# Altium PCB power.PcbDoc
Units mm, origin at the board's own origin, x right, y up, seen from the top; angles counter-clockwise.
Board outline 461.9 x 457.33 mm, 2 copper layers (Top Layer, Bottom Layer); 16 components, 20 nets, 69 pads, 0 vias.
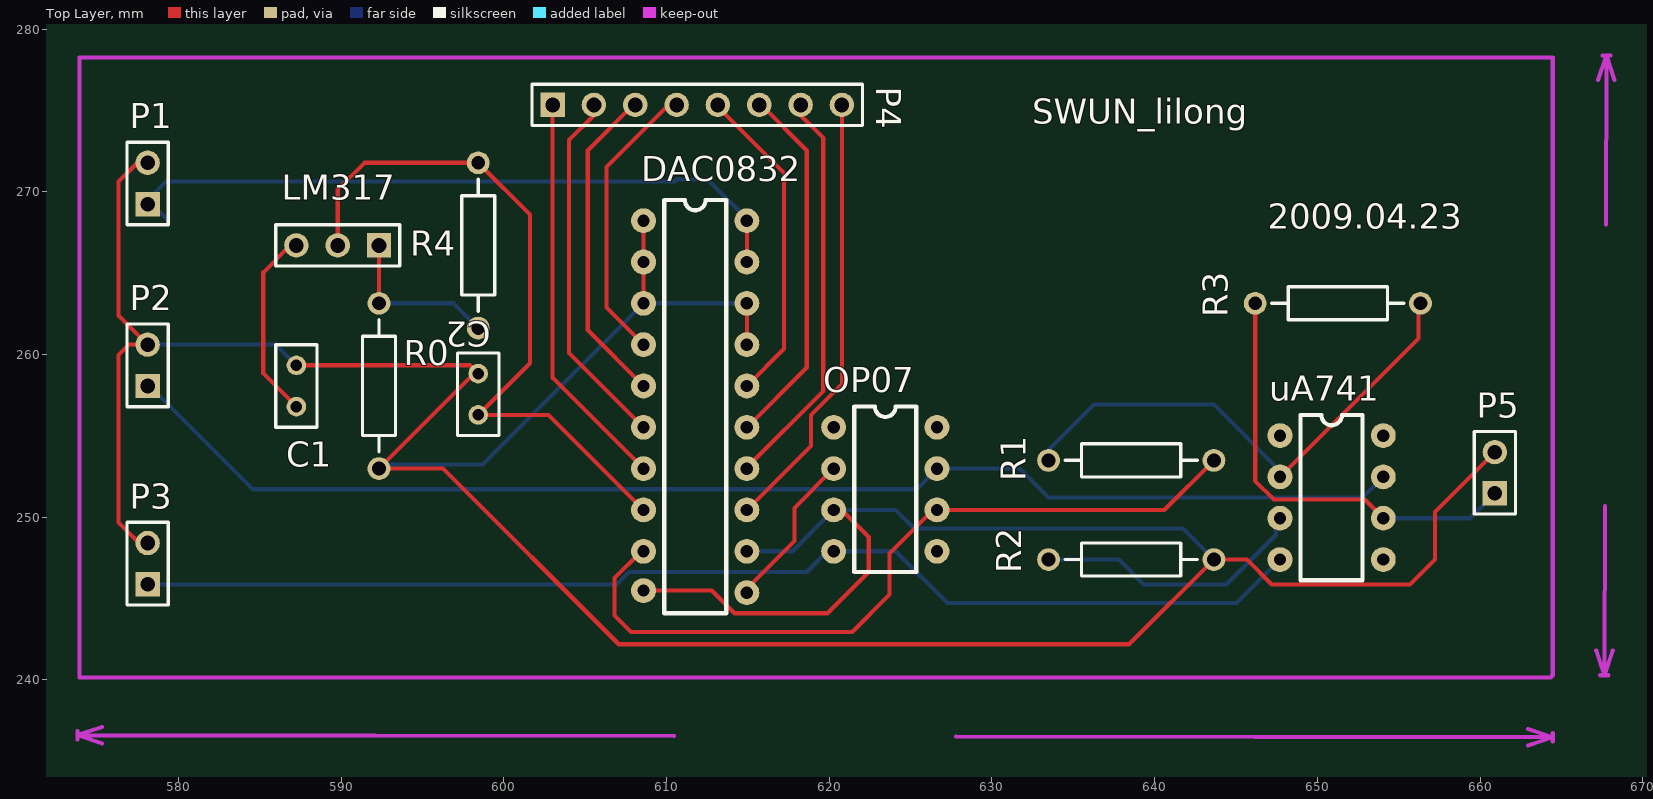
[diagram p0: Top Layer view]
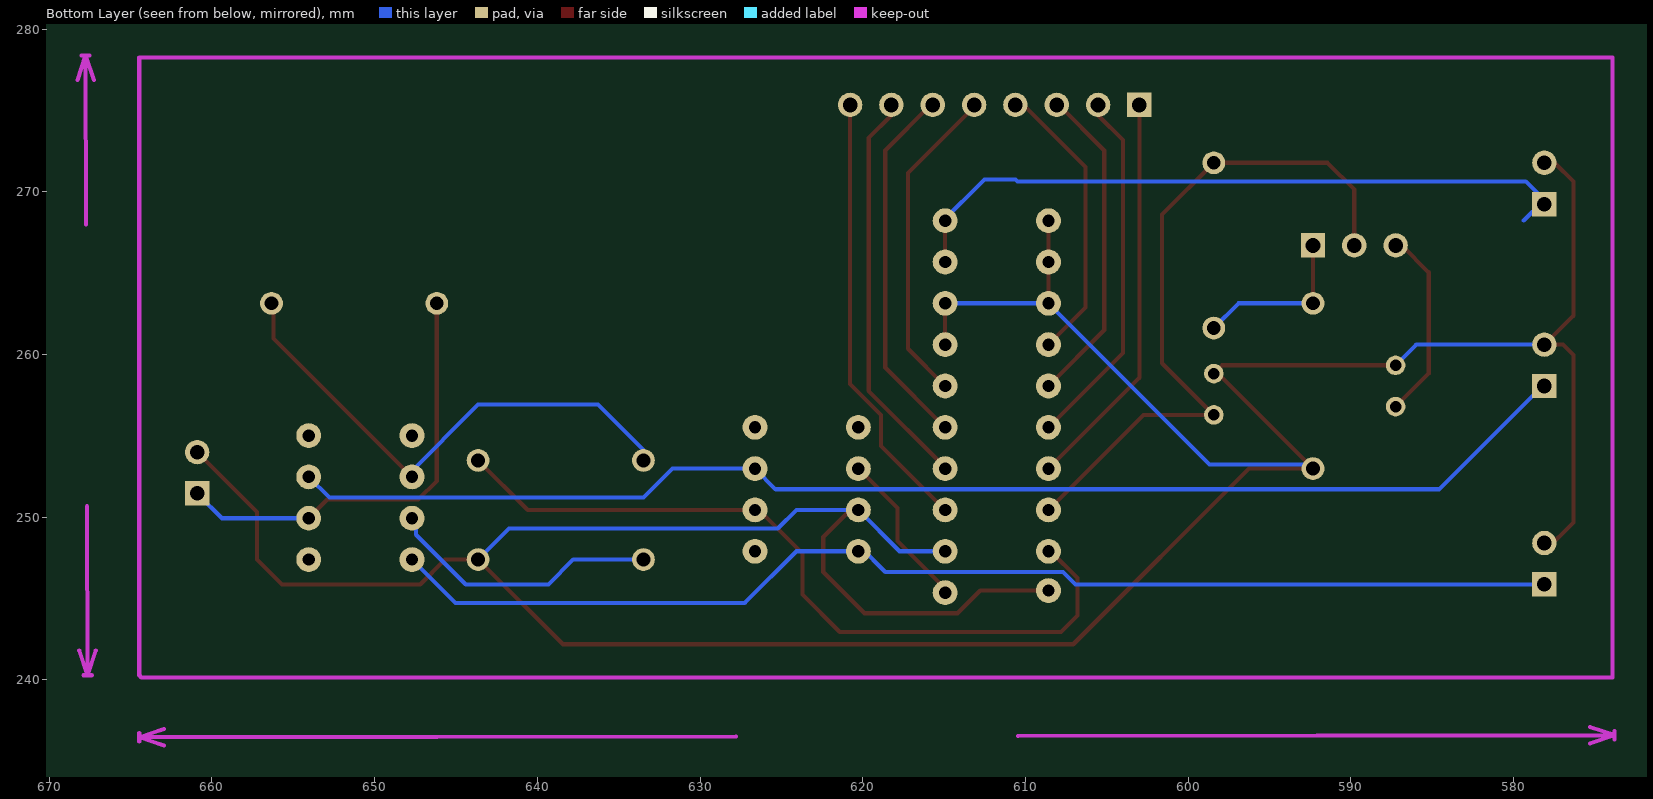
[diagram p1: Bottom Layer view, seen from below]

## Layer stack, top to bottom
Top Layer: signal copper 0.0356
Dielectric: dielectric 0.32, FR-4, Dk 4.8
Bottom Layer: signal copper 0.0356

## Board outline
501.777,534.416 501.777,78.359 963.676,78.359 963.676,535.686

## Design rules (kind name [scope] priority, off if disabled: settings)
Clearance [All] p1: gap=0.254
ComponentClearance [All] p1: gap=0.254 collisioncheckmode=0
PolygonConnect [All] p1: connectstyle=Relief reliefconductorwidth=0.254 reliefentries=4 polygonreliefangle="90 Angle"
RoutingVias [All] p1: holewidth=0.711 width=1.27 viastyle="Through Hole" minholewidth=0.711 minwidth=1.27 maxholewidth=0.711 maxwidth=1.27
SolderMaskExpansion [All] p1: expansion=0.102
TestPointUsage [All] p1: valid=0 allowmultiple=FALSE
Testpoint [All] p1: side=15 testpointundercomponent=TRUE minsize=1.016 maxsize=2.54 preferedsize=1.524 minholesize=0 maxholesize=1.016 preferedholesize=0.813 testpointgrid=0.025 style=1023 order=-539222988
Width [All] p1: maxlimit=0.254 minlimit=0.254 preferedwidth=0.254
17 further rules are at their usual default settings.

## Components (designator, comment, footprint, x,y, rotation, side; value= is the part's Value field where it differs from the comment)
C1 "" RAD-0.1 587.248,258.064 r270 top
C2 "" RAD-0.1 598.424,257.556 r90 top
DAC0832 "DAC0832" DIP-20 611.124,268.224 r0 top (schematic designator U1)
LM317 "*" HDR1X3 592.328,266.7 r180 top
OP07 "0P07" DIP-8 625.348,268.224 r0 top (schematic designator U2)
P1 "" HDR1X2 578.104,269.24 r90 top
P2 "" HDR1X2 578.104,258.064 r90 top
P3 "" HDR1X2 578.104,245.872 r90 top
P4 "" HDR1X8 602.996,275.336 r0 top
P5 "Header 2" HDR1X2 660.908,251.46 r90 top
R0 "Res Adj2" AXIAL-0.4 592.328,258.064 r90 top
R1 "" AXIAL-0.4 638.556,253.492 r180 top
R2 "" AXIAL-0.4 638.556,247.396 r180 top
R3 "" AXIAL-0.4 651.256,263.144 r180 top
R4 "" AXIAL-0.4 598.424,266.7 r90 top
uA741 "uA741" DIP-8 652.78,267.716 r0 top (schematic designator U3)

## Footprints (in the part's own frame and the unit in brackets; to place one, negate y for a bottom-side part, rotate by r counter-clockwise, add the part's x,y. Pads: shape width x height; smd on the part's side, far side on the other; paste and mask are expansions set on the pad)
AXIAL-0.4 [mm] "Resistor; 2 Leads"
  round 1.4 hole 0.85: 1(-5.08,0) 2(5.08,0)
  silkscreen extent -4.06,-1.02 4.06,1.02
DIP-8 [mil]
  round 60 hole 30: 1(-200,-500) 2(-200,-600) 3(-200,-700) 4(-200,-800) 5(50,-800) 6(50,-700) 7(50,-600) 8(50,-500)
  silkscreen extent -150,-850 0,-450
DIP-20 [mil]
  round 60 hole 30: 1(-100,0) 2(-100,-100) 3(-100,-200) 4(-100,-300) 5(-100,-400) 6(-100,-500) 7(-100,-600) 8(-100,-700) 9(-100,-800) 10(-100,-895) 11(150,-900) 12(150,-800) 13(150,-700) 14(150,-600) 15(150,-500) 16(150,-400) 17(150,-300) 18(150,-200) 19(150,-100) 20(150,0)
  silkscreen extent -50,-950 100,50
HDR1X2 [mm] "Connector; Header; 2 Position"
  rect 1.5x1.5 hole 0.9: 1(0,0)
  round 1.5 hole 0.9: 2(2.54,0)
  silkscreen extent -1.27,-1.27 3.81,1.27
HDR1X3 [mm] "Connector; Header; 3 Position"
  rect 1.5x1.5 hole 0.9: 1(0,0)
  round 1.5 hole 0.9: 2(2.54,0) 3(5.08,0)
  silkscreen extent -1.27,-1.27 6.35,1.27
HDR1X8 [mm] "Connector; Header; 8 Position"
  rect 1.5x1.5 hole 0.9: 1(0,0)
  round 1.5 hole 0.9: 2(2.54,0) 3(5.08,0) 4(7.62,0) 5(10.16,0) 6(12.7,0) 7(15.24,0) 8(17.78,0)
  silkscreen extent -1.27,-1.27 19.05,1.27
RAD-0.1 [mm] "Indicating Instrument; 2 Leads"
  round 1.2 hole 0.7: 1(-1.27,0) 2(1.27,0)
  silkscreen extent -2.54,-1.27 2.54,1.27

## Part data
C1: library part Cap, "Capacitor"
C2: library part Cap2, "Capacitor"
LM317: library part LM317
OP07: library part OP07
P1 P2 P3: library part "Header 2", "Header, 2-Pin"
P4: library part "Header 8", "Header, 8-Pin"
P5: "Header, 2-Pin"
R0: "Variable Resistor"
R1 R2 R3 R4: library part Res2, "Resistor"

## Nets (pads, with @x,y where several pads share a name; then routed paths per layer and width w, separated by ;. In a path a pad name is that pad's centre, name@x,y a point inside that pad or via, vN(x,y) a via of type N, cw(c..) or ccw(c..) an arc to the next point about the centre after c; other vN are vias at no path point)
+5V: DAC0832.19 DAC0832.20 P1.1 | length 43.1
  Top Layer w0.254: DAC0832.19 DAC0832.20
  Bottom Layer w0.254: P1.1@577.977,269.367 579.247,270.637 610.489,270.637 610.616,270.764 612.521,270.764 DAC0832.20@615.188,268.097 ; P1.1@578.231,269.367 579.374,268.224
+15V: OP07.7 P2.1 uA741.7 | length 80.4
  Bottom Layer w0.254: P2.1 578.231,258.064 584.581,251.714 625.348,251.714 OP07.7 631.698,252.984 633.476,251.206 652.78,251.206 uA741.7
-15V: OP07.4 P3.1 uA741.4 | length 73.1
  Bottom Layer w0.254: P3.1 606.933,245.872 607.695,246.634 618.617,246.634 620.141,248.158 620.141,248.031 OP07.4 624.078,247.904 627.253,244.729 645.033,244.729 uA741.4
D0: DAC0832.7 P4.1 | length 24.7
  Top Layer w0.254: P4.1 602.996,258.572 DAC0832.7
D1: DAC0832.6 P4.2 | length 22.3
  Top Layer w0.254: P4.2 605.536,274.701 604.012,273.177 604.012,260.096 DAC0832.6
D2: DAC0832.5 P4.3 | length 20
  Top Layer w0.254: P4.3 607.949,275.336 605.155,272.542 605.155,261.493 DAC0832.5
D3: DAC0832.4 P4.4 | length 17.8
  Top Layer w0.254: DAC0832.4 606.298,262.89 606.298,271.526 610.108,275.336 P4.4
D4: DAC0832.16 P4.5 | length 19.9
  Top Layer w0.254: P4.5 613.156,275.209 617.22,271.145 617.22,260.35 DAC0832.16
D5: DAC0832.15 P4.6 | length 22.6
  Top Layer w0.254: DAC0832.15 618.617,259.207 618.617,272.542 615.823,275.336 P4.6
D6: DAC0832.14 P4.7 | length 24.8
  Top Layer w0.254: DAC0832.14@614.934,253.067 619.633,257.766 619.633,273.304 618.236,274.701 P4.7
D7: DAC0832.13 P4.8 | length 27.3
  Top Layer w0.254: DAC0832.13 618.871,254.381 618.871,256.286 620.776,258.191 P4.8
GND: C1.1 C2.2 DAC0832.1 DAC0832.2 DAC0832.3 DAC0832.10 DAC0832.12 DAC0832.17 DAC0832.18 OP07.3 P1.2 P2.2 P3.2 P5.2 R0.1 R2.1 | length 224.6
  Top Layer w0.254: P3.2@578.104,247.904 576.326,249.682 576.326,259.969 576.961,260.604 P2.2 576.326,262.382 576.326,270.637 577.469,271.78 P1.2 ; C1.1 597.916,259.334 C2.2 598.17,258.826 R0.1 596.265,252.984 607.06,242.189 638.429,242.189 R2.1 645.668,247.396 647.192,245.872 655.701,245.872 657.225,247.396 657.225,250.317 P5.2 ; DAC0832.10 612.775,245.491 614.172,244.094 619.887,244.094 622.427,246.634 622.427,248.793 OP07.3@620.522,250.698 ; DAC0832.1 608.584,263.017 DAC0832.3@608.711,262.89 ; DAC0832.17 DAC0832.18
  Bottom Layer w0.254: P2.2 585.978,260.604 C1.1 ; R0.1@592.201,253.111 592.201,253.238 598.678,253.238 DAC0832.3 DAC0832.18 ; DAC0832.12 617.728,247.904 OP07.3 624.078,250.444 625.221,249.301 641.731,249.301 R2.1
NetC1_2: C1.2 LM317.3 | length 11.8
  Top Layer w0.254: C1.2 585.216,258.826 585.216,265.049 586.867,266.7 LM317.3
NetC2_1: C2.1 DAC0832.8 LM317.2 R4.2 | length 43.5
  Top Layer w0.254: LM317.2 589.788,270.129 591.439,271.78 R4.2 601.599,268.605 601.599,259.461 C2.1 602.742,256.286 DAC0832.8
NetLM317_1: LM317.1 R0.2 R4.1 | length 10.3
  Top Layer w0.254: R0.2 LM317.1
  Bottom Layer w0.254: R0.2 596.9,263.144 R4.1
NetR1_1: DAC0832.9 OP07.6 R1.1 | length 48
  Top Layer w0.254: DAC0832.9 608.457,247.904 606.806,246.253 606.806,243.967 607.822,242.951 621.411,242.951 623.697,245.237 623.697,247.777 OP07.6@626.618,250.698 ; OP07.6 640.588,250.444 R1.1
NetR1_2: R1.2 R3.1 uA741.2 | length 32.6
  Top Layer w0.254: uA741.2 656.209,260.985 R3.1@656.209,263.525
  Bottom Layer w0.254: R1.2 633.476,254.127 636.27,256.921 643.636,256.921 uA741.2@647.954,252.603
NetR2_2: R2.2 uA741.3 | length 16.9
  Bottom Layer w0.254: R2.2 637.794,247.396 639.318,245.872 644.398,245.872 647.446,248.92 uA741.3@647.446,249.936
NetU1_11: DAC0832.11 OP07.2 | length 9.8
  Top Layer w0.254: DAC0832.11 614.934,245.618 617.855,248.539 617.855,250.571 OP07.2
VOUT: P5.1 R3.2 uA741.6 | length 27.1
  Top Layer w0.254: R3.2 646.176,252.222 647.319,251.079 652.907,251.079 uA741.6
  Bottom Layer w0.254: uA741.6 659.384,249.936 P5.1@660.781,251.333
pads on no net: OP07.1 OP07.5 OP07.8 uA741.1 uA741.5 uA741.8

## Keep-outs
Keep-Out Layer:
  lines w0.254: 573.786,236.347 573.786,236.855 ; 575.309,236.091 573.786,236.601 ; 575.311,237.107 573.786,236.601 ; 610.466,236.55 573.786,236.601 ; 627.784,236.525 664.464,236.474 ; 662.939,235.968 664.464,236.474 ; 662.941,236.984 664.464,236.474 ; 664.464,236.22 664.464,236.728 ; 667.136,241.81 667.639,240.284 ; 667.253,276.862 667.766,278.384 ; 667.385,240.285 667.893,240.283 ; 667.512,278.385 668.02,278.383 ; 667.674,250.675 667.639,240.284 ; 667.731,267.993 667.766,278.384 ; 668.152,241.806 667.639,240.284 ; 668.269,276.858 667.766,278.384 ; 573.913,240.157 573.913,278.257 664.464,278.257 664.464,240.284 664.337,240.157 630.174,240.157 619.125,240.157 602.234,240.157 573.913,240.157
  text "38.1002 (mm)" at 668.589,250.926 h1.52 r89.81
  text "90.6781 (mm)" at 610.719,235.635 h1.52 r359.92

## Silkscreen, mask and mechanical layers (free items; w line width, h text height)
Top Overlay:
  text "SWUN_lilong" at 632.46,274.193 h1.52
  text "2009.04.23" at 646.938,267.716 h1.52